# EAGLE board ESP012-16-Channel-PWM1 (EAGLE 7.5.0)
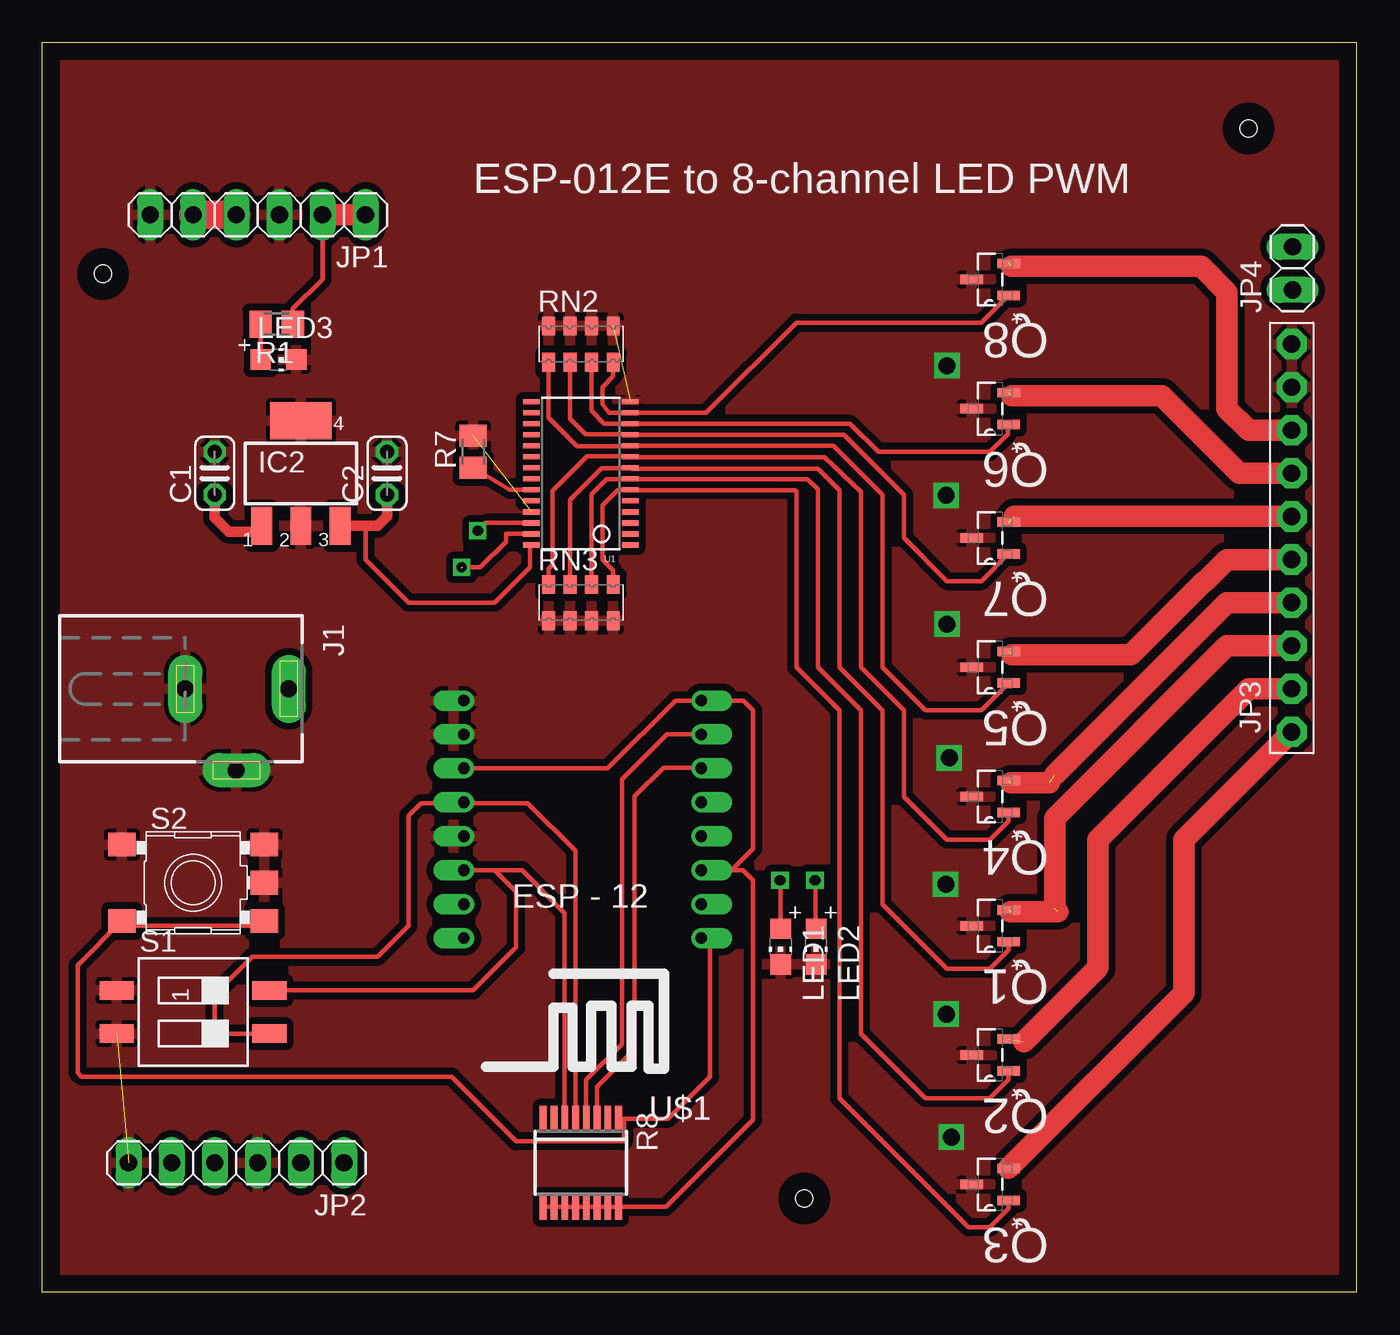
[diagram p0: board, top side]
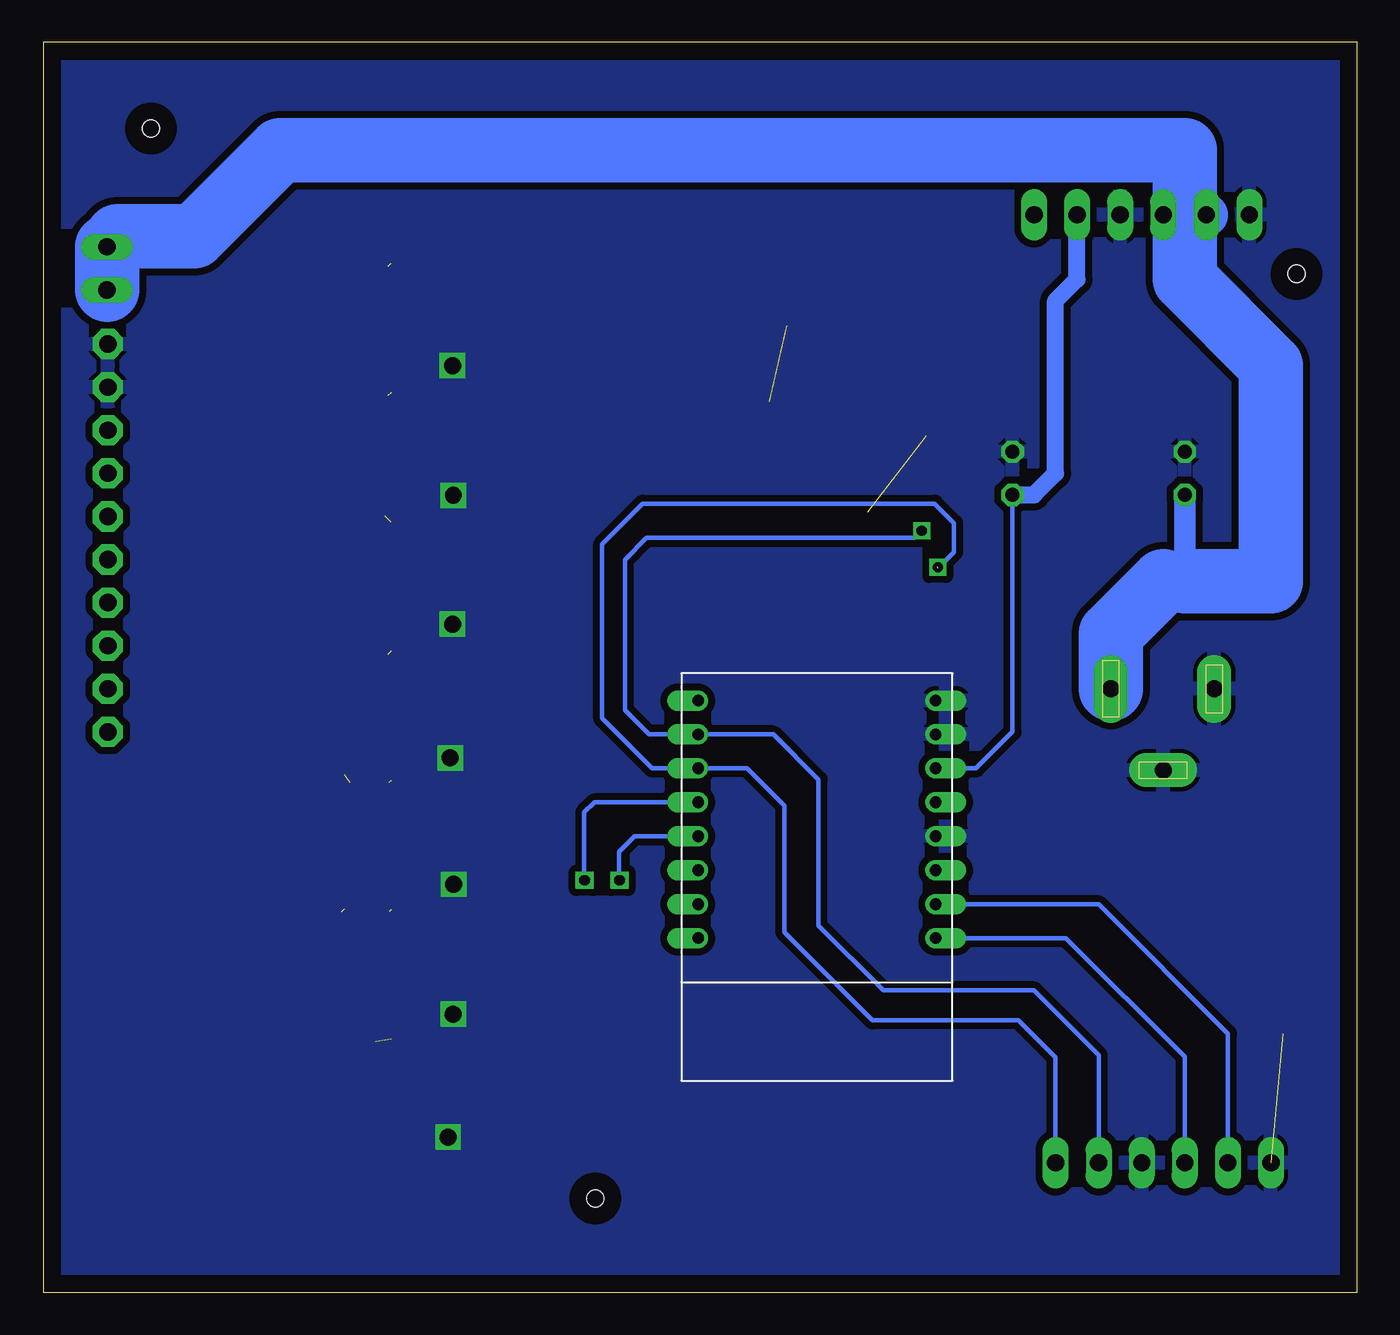
[diagram p1: board, bottom side, seen from below]

Size 77.47 x 73.66 mm. Coordinates in mm from the lower left corner, seen from the top.
Outline: 0,73.66 77.47,73.66 77.47,0 0,0 0,73.66
Copper layers (1*16): Top 0.035mm / dielectric 1.5mm / Bottom 0.035mm
Design rules "default": minimum track width 10mil, minimum drill 24mil, track to track 8mil, track to pad 8mil, pad to pad 8mil, via to via 8mil, smd to smd 8mil, copper to edge 40mil, drill to drill 8mil, minimum pad ring 10mil, minimum via ring 8mil, stop-mask expansion 4mil, vias tented up to drill 0mil, thermal gap 10mil
Net classes: 0 default: drill 0.6 mm; 1 GND: drill 0.6 mm
Holes 1 mm at 3.57,60.02 71.12,68.58 44.92,5.52

## Footprints (pad centres in the part's own frame; a part is rotated, then mirrored left to right if it is on the bottom)
C025-024X044 = drill 0.813 octagon: 1 -1.27,0; 2 1.27,0
SOT223 = smd 1.219 x 2.235: 1 -2.311,-3.099; 2 0,-3.099; 3 2.311,-3.099 | smd 3.6 x 2.2: 4 0,3.099
DCJ0202 = drill 1 pad 2 long: 1 0,3.1; 2 4.8,0; 3 0,-3
1X06 = drill 1.016 long: 1 -6.35,0; 2 -3.81,0; 3 -1.27,0; 4 1.27,0; 5 3.81,0; 6 6.35,0
1X10-BIG = drill 1.016 pad 1.778 octagon: 1 -11.43,0; 2 -8.89,0; 3 -6.35,0; 4 -3.81,0; 5 -1.27,0; 6 1.27,0; 7 3.81,0; 8 6.35,0; 9 8.89,0; 10 11.43,0
1X02 = drill 1.016 long: 1 -1.27,0; 2 1.27,0
CHIP-LED0805 = smd 1.2 x 1.2: A 0,-1.05; C 0,1.05
SOT95P237X112-3N = smd 1.321 x 0.559: 1 -1.092,0.94; 2 -1.092,-0.94; 3 1.092,0
M2012 = smd 1.3 x 1.6: 1 -0.95,0; 2 0.95,0
2QSP16 = smd 0.4 x 1.5: 1 -2.223,-2.6; 2 -1.588,-2.6; 3 -0.953,-2.6; 4 -0.318,-2.6; 5 0.318,-2.6; 6 0.953,-2.6; 7 1.588,-2.6; 8 2.223,-2.6; 9 2.223,2.6; 10 1.588,2.6; 11 0.953,2.6; 12 0.318,2.6; 13 -0.318,2.6; 14 -0.953,2.6; 15 -1.588,2.6; 16 -2.223,2.6
EXBS8V = smd 0.75 x 1.1: 1 -1.905,-1.07; 2 -0.635,-1.07; 3 0.635,-1.07; 4 1.905,-1.07; 5 1.905,1.07; 6 0.635,1.07; 7 -0.635,1.07; 8 -1.905,1.07
SMS-002 = smd 1.092 x 2.007: 1 -1.27,-4.496; 2 1.27,-4.496; 3 1.27,4.496; 4 -1.27,4.496
SKHMPXE010 = smd 1.6 x 1.4: 1 -4.2,2.25; 2 4.2,2.25; 3 -4.2,-2.25; 4 4.2,-2.25; 5 4.2,0
TSSOP28 = smd 0.305 x 0.991: 1 -4.225,-2.918; 2 -3.575,-2.918; 3 -2.925,-2.918; 4 -2.275,-2.918; 5 -1.625,-2.918; 6 -0.975,-2.918; 7 -0.325,-2.918; 8 0.325,-2.918; 9 0.975,-2.918; 10 1.625,-2.918; 11 2.275,-2.918; 12 2.925,-2.918; 13 3.575,-2.918; 14 4.225,-2.918; 15 4.225,2.918; 16 3.575,2.918; 17 2.925,2.918; 18 2.275,2.918; 19 1.625,2.918; 20 0.975,2.918; 21 0.325,2.918; 22 -0.325,2.918; 23 -0.975,2.918; 24 -1.625,2.918; 25 -2.275,2.918; 26 -2.925,2.918; 27 -3.575,2.918; 28 -4.225,2.918
ESP12 = drill 0.7 offset: ADC -7.1,3.8; CH_PD -7.1,1.8; GND 6.9,-8.2; GPIO0 6.9,-2.2; GPIO2 6.9,-4.2; GPIO4 6.9,1.8; GPIO5 6.9,-0.2; GPIO12 -7.1,-4.2; GPIO13 -7.1,-6.2; GPIO14 -7.1,-2.2; GPIO15 6.9,-6.2; GPIO16 -7.1,-0.2; RESET -7.1,5.8; RX 6.9,3.8; TX 6.9,5.8; VCC -7.1,-8.2

## Placement (x,y rotation side)
C1  0.33 µF  [C025-024X044]  10.16,48.26 90 top
C2  0.1 µF  [C025-024X044]  20.32,48.26 90 top
IC2  UA78M33DCY  [SOT223]  15.24,48.26 0 top
J1  DCJ0202  [DCJ0202]  11.43,35.56 270 top
JP1  [1X06]  12.7,63.5 180 top
JP2  [1X06]  11.43,7.62 180 top
JP3  PINHD-1X10  [1X10-BIG]  73.66,44.45 90 top
JP4  [1X02]  73.71,60.34 90 top
LED1  [CHIP-LED0805]  43.53,20.37 180 top
LED2  [CHIP-LED0805]  45.62,20.37 180 top
LED3  [CHIP-LED0805]  13.92,54.96 270 top
Q1  IRLML2244TRPBF  [SOT95P237X112-3N]  55.88,21.59 180 top
Q2  IRLML2244TRPBF  [SOT95P237X112-3N]  55.88,13.97 180 top
Q3  IRLML2244TRPBF  [SOT95P237X112-3N]  55.88,6.35 180 top
Q4  IRLML2244TRPBF  [SOT95P237X112-3N]  55.88,29.21 180 top
Q5  IRLML2244TRPBF  [SOT95P237X112-3N]  55.88,36.83 180 top
Q6  IRLML2244TRPBF  [SOT95P237X112-3N]  55.88,52.07 180 top
Q7  IRLML2244TRPBF  [SOT95P237X112-3N]  55.88,44.45 180 top
Q8  IRLML2244TRPBF  [SOT95P237X112-3N]  55.88,59.69 180 top
R1  5K  [M2012]  13.82,57.05 180 top
R7  5K  [M2012]  25.4,49.53 90 top
R8  [2QSP16]  31.75,7.62 180 top
RN2  [EXBS8V]  31.75,55.88 0 top
RN3  [EXBS8V]  31.75,40.64 0 top
S1  SWS002  [SMS-002]  8.89,16.51 270 top
S2  SKHMPSE010  [SKHMPXE010]  8.89,24.13 0 top
U1  [TSSOP28]  31.75,48.26 90 top
U$1  ESP12  [ESP12]  31.75,26.67 180 top

## Library data of the parts
C1 C2 = resistor
IC2 = linear
J1 = con-jack; OC_FARNELL: unknown; OC_NEWARK: unknown
JP1 JP2 JP4 = pinhead
JP3 LED1-LED3 R1 R7 U1 = adafruit
Q1-Q8 = International_Rectifier_By_element14_Batch_1; MPN: IRLML2244TRPBF; OC_FARNELL: 1888165; OC_NEWARK: 40T7448; PACKAGE: SOT-3; SUPPLIER: International Rectifier
R8 = resistor-bourns; OC_FARNELL: unknown; OC_NEWARK: unknown
RN2 RN3 = resistor-dil; OC_FARNELL: unknown; OC_NEWARK: unknown
S1 = smd-special
S2 = switch
U$1 = esp8266modules

## Nets
A0: U1.1
A1: U1.2
A2: U1.3
A3: U1.4
A4: U1.5
A5: U1.24
GND: C1.2 C2.2 IC2.2 IC2.4 J1.2 J1.3 JP1.3 JP1.6 JP2.3 JP2.6 JP3.9 JP3.10 LED1.C LED2.C LED3.C Q1.3 Q2.3 Q3.3 Q4.3 Q5.3 Q6.3 Q7.3 Q8.3 R7.2 RN2.5 RN2.6 RN2.7 RN2.8 RN3.1 RN3.2 RN3.3 RN3.4 S1.1 S1.2 S2.1 S2.2 S2.5 U1.14 U1.25 U$1.GND U$1.GPIO5 U$1.GPIO15
GPIO0: R8.5 S1.3 U$1.GPIO0
GPIO4: R8.6 S1.4 U$1.GPIO4
LED0: JP3.1 Q3.2
LED1: JP3.2 Q2.2
LED2: JP3.3 Q1.2
LED3: JP3.4 Q4.2
LED4: JP3.5 Q5.2
LED5: JP3.6 Q7.2
LED6: JP3.7 Q6.2
LED7: JP3.8 Q8.2
N$1: R7.1 U1.23
PWM0: Q3.1 RN3.5 U1.6
PWM1: Q2.1 RN3.6 U1.7
PWM2: Q1.1 RN3.7 U1.8
PWM3: Q4.1 RN3.8 U1.9
PWM4: Q5.1 RN2.1 U1.10
PWM5: Q7.1 RN2.2 U1.11
PWM6: Q6.1 RN2.3 U1.12
PWM7: Q8.1 RN2.4 U1.13
PWM8: U1.15
PWM9: U1.16
PWM10: U1.17
PWM11: U1.18
PWM12: U1.19
PWM13: U1.20
PWM14: U1.21
PWM15: U1.22
RESET: R8.1 S2.3 S2.4 U$1.RESET
RX: JP2.5 U$1.RX
S$1: LED1.A U$1.GPIO16
S$2: LED2.A U$1.GPIO14
S$6: LED3.A R1.2
SCL: JP2.2 R8.4 U1.26 U$1.GPIO13
SDA: JP2.1 R8.3 U1.27 U$1.GPIO12
TX: JP2.4 U$1.TX
VCC3.3: C2.1 IC2.3 JP1.1 JP1.2 R1.1 R8.9 R8.10 R8.11 R8.12 R8.13 R8.14 R8.15 R8.16 U1.28 U$1.CH_PD U$1.GPIO2 U$1.VCC
VCC12: C1.1 IC2.1 J1.1 JP1.4 JP1.5 JP4.1 JP4.2

## Tracks (layer width: path | path; a pad name or v marks a point on that pad's centre or on a via)
GND  (via drill 1)  (3 unrouted)
  other vias: 53.29,46.96 53.34,54.61 53.34,39.37 53.47,31.49 53.27,24.04 53.3,16.38 53.6,9.14
  pour Bottom (isolate 0.406): 76.2,72.39 76.2,1.27 1.27,1.27 1.27,72.39
  pour Top (isolate 0.406): 1.02,72.71 76.32,72.56 76.32,1.32 1.07,1.32
GPIO0
  Top 0.254: R8.5 31.43,26.01 28.62,28.82 24.9,28.82 U$1.GPIO0 24.8,28.82 22.32,28.82 21.59,28.09 21.59,21.59 19.77,19.77 12.37,19.77 10.16,17.56 10.16,15.24 S1.3
GPIO4
  Top 0.254: R8.6 30.8,22.34 28.27,24.87 26.67,24.87 | 26.67,24.87 U$1.GPIO4 | S1.4 25.4,17.78 27.94,20.32 27.94,23.6 26.67,24.87
LED0
  Top 1.27: JP3.1 67.31,26.67 67.31,17.63 Q3.2
LED1  (1 unrouted)
  Top 1.27: JP3.2 71.12,35.56 62.23,26.67 62.23,19.13 57.87,14.77
LED2  (2 unrouted)
  Top 1.27: JP3.3 69.85,38.1 59.69,27.94 59.69,22.6 | 59.87,22.42 57.08,22.42
LED3  (2 unrouted)
  Top 1.27: JP3.4 69.85,40.64 59.69,30.48 | 59.37,30.02 57.1,30.02
LED4  (1 unrouted)
  Top 1.27: JP3.5 69.85,43.18 68.58,41.91 68.51,41.91 64.17,37.57 57.17,37.57
LED5  (1 unrouted)
  Top 1.27: JP3.6 57.3,45.72
LED6  (1 unrouted)
  Top 1.27: JP3.7 70.58,48.26 66.02,52.82 57.16,52.82
LED7  (1 unrouted)
  Top 1.27: JP3.8 71.12,50.8 69.85,52.07 69.85,58.94 68.32,60.47 57.13,60.47
N$1
  Top 0.254: R7.1 27.56,47.28 U1.23
PWM0
  Top 0.254: Q3.1 56.97,4.9 55.88,3.81 54.61,3.81 46.99,11.43 46.99,34.29 44.45,36.83 44.45,47.19 44.37,47.27 34.68,47.27 U1.6 34.63,47.32 33.92,47.27 33.77,47.12 33.02,46.37 33.02,43.18 33.66,42.55 RN3.5
PWM1
  Top 0.254: Q2.1 56.97,12.52 55.88,11.43 52.07,11.43 48.26,15.24 48.26,34.29 45.72,36.83 45.72,47.32 45.12,47.92 34.68,47.92 U1.7 34.65,47.92 33.27,47.92 32.38,47.04 RN3.6
PWM2
  Top 0.254: Q1.1 56.97,20.14 55.88,19.05 53.34,19.05 49.53,22.86 49.53,34.29 46.99,36.83 46.99,47.25 45.72,48.52 34.73,48.52 U1.8 34.65,48.57 32.97,48.57 31.11,46.72 RN3.7
PWM3
  Top 0.254: Q4.1 56.97,27.76 55.88,26.67 53.34,26.67 50.8,29.21 50.8,34.29 48.26,36.83 48.26,47.18 46.12,49.22 34.78,49.22 U1.9 34.63,49.27 32.12,49.27 30.07,47.22 30.07,42.87 29.84,42.65 RN3.8
PWM4
  Top 0.254: Q5.1 55.37,34.29 52.07,34.29 49.53,36.83 49.53,46.99 46.64,49.89 U1.10 34.65,49.87 31.52,49.87 29.84,51.55 RN2.1
PWM5
  Top 0.254: Q7.1 55.37,41.91 53.34,41.91 50.8,44.45 50.8,46.99 47.26,50.54 U1.11 34.63,50.57 32.02,50.57 31.11,51.48 RN2.2
PWM6
  Top 0.254: Q6.1 56.92,51.19 56.92,50.57 55.88,49.53 49.31,49.53 47.62,51.17 34.7,51.17 U1.12 34.63,51.17 33.12,51.17 32.38,51.95 RN2.3
PWM7
  Top 0.254: Q8.1 55.37,57.15 44.45,57.15 39.14,51.84 U1.13 34.58,51.82 33.42,51.82 33.02,52.32 33.02,53.34 33.66,53.98 RN2.4
RESET
  Top 0.254: U$1.RESET 39.37,20.35 39.37,12.7 36.89,10.22 R8.1 34.23,10.22 34.29,10.16 34.29,8.89 27.94,8.89 24.13,12.7 2.29,12.7 2.07,12.92 2.07,19.26 S2.3 4.79,21.88 5.08,21.59 12.8,21.59 S2.4
RX
  Bottom 0.254: JP2.5 7.62,15.24 15.24,22.86 U$1.RX
S$1  (via drill 0.6)
  Top 0.254: LED1.A v43.52,24.27
  Bottom 0.254: v43.52,24.27 43.52,25.97 42.62,26.87 U$1.GPIO16
S$2  (via drill 0.6)
  Top 0.254: v45.57,24.27 45.57,21.47 LED2.A
  Bottom 0.254: U$1.GPIO14 44.97,28.87 45.57,28.27 v45.57,24.27
S$4  (via drill 0.6)
  other vias: 43.47,24.27
S$5  (via drill 0.6)
  other vias: 45.52,24.27
S$6
  Top 0.254: R1.2 LED3.A
SCL  (via drill 0.6)
  Top 0.254: R8.4 32.07,12.52 34.17,14.62 34.17,30.22 36.82,32.87 U$1.GPIO13 | U1.26 26.13,45.34 v25.67,44.87
  Bottom 0.254: JP2.2 15.24,13.97 19.05,17.78 27.94,17.78 31.75,21.59 31.75,30.2 34.42,32.87 U$1.GPIO13 41.76,32.87 43.18,34.29 43.18,43.18 41.91,44.45 26.09,44.45 v25.67,44.87
SDA  (via drill 0.6)  (2 unrouted)
  Top 0.254: R8.3 32.7,12.1 34.92,14.32 34.92,29.22 36.62,30.92 38.8,30.92 U$1.GPIO12 | U1.27 27.34,44.69 27.34,44.23 25.82,42.72 24.77,42.72
  Bottom 0.254: JP2.1 17.78,13.83 19.97,16.02 28.57,16.02 33.77,21.22 33.77,28.67 35.97,30.87 U$1.GPIO12 41.57,30.87 44.52,33.82 44.52,44.07 42.12,46.47 24.92,46.47 23.77,45.32 23.77,43.62 24.72,42.67
  other vias: 24.72,42.72
TX
  Bottom 0.254: JP2.4 10.16,13.86 17.17,20.87 U$1.TX
VCC3.3
  Top 0.254: 40.64,24.87 41.32,24.87 41.91,24.28 41.91,10.16 36.77,5.02 R8.16 R8.15 R8.14 R8.13 R8.12 R8.11 R8.10 R8.9 | 40.64,24.87 U$1.CH_PD | U1.28 28.77,43.97 28.77,42.74 26.67,40.64 21.59,40.64 19.05,43.18 19.05,45.16 | 40.64,24.87 41.91,26.14 41.91,34.29 41.33,34.87 U$1.VCC 37.32,34.87 33.32,30.87 U$1.GPIO2 | R1.1 14.77,57.95 16.51,59.69 JP1.2
  Top 0.61: IC2.3 19.05,45.16 19.76,45.16 20.32,45.72 C2.1
  Top 1.27: JP1.2 JP1.1
  Bottom 0.254: U$1.GPIO2 22.47,30.87 20.32,33.02 C2.1
  Bottom 1.016: C2.1 19.05,46.99 17.78,48.26 17.78,58.42 16.51,59.69 JP1.2
VCC12
  Top 0.61: C1.1 10.16,45.63 10.97,44.82 12.59,44.82 IC2.1
  Top 1.676: JP1.5 JP1.4
  Bottom 1.27: C1.1 10.16,41.91
  Bottom 2.54: 11.43,41.91 10.16,41.91 | JP1.5 10.16,63.5 | 73.09,62.23 JP4.2
  Bottom 3.81: J1.1 14.53,38.81 11.43,41.91 | 10.16,41.91 5.08,41.91 5.08,54.61 10.16,59.69 10.16,63.5 10.16,67.31 63.5,67.31 68.58,62.23 73.09,62.23 | JP4.2 JP4.1

## Text on the board
tPlace: ESP-012E to 8-channel LED PWM